# EAGLE board ir-transceiver (EAGLE 4.16)
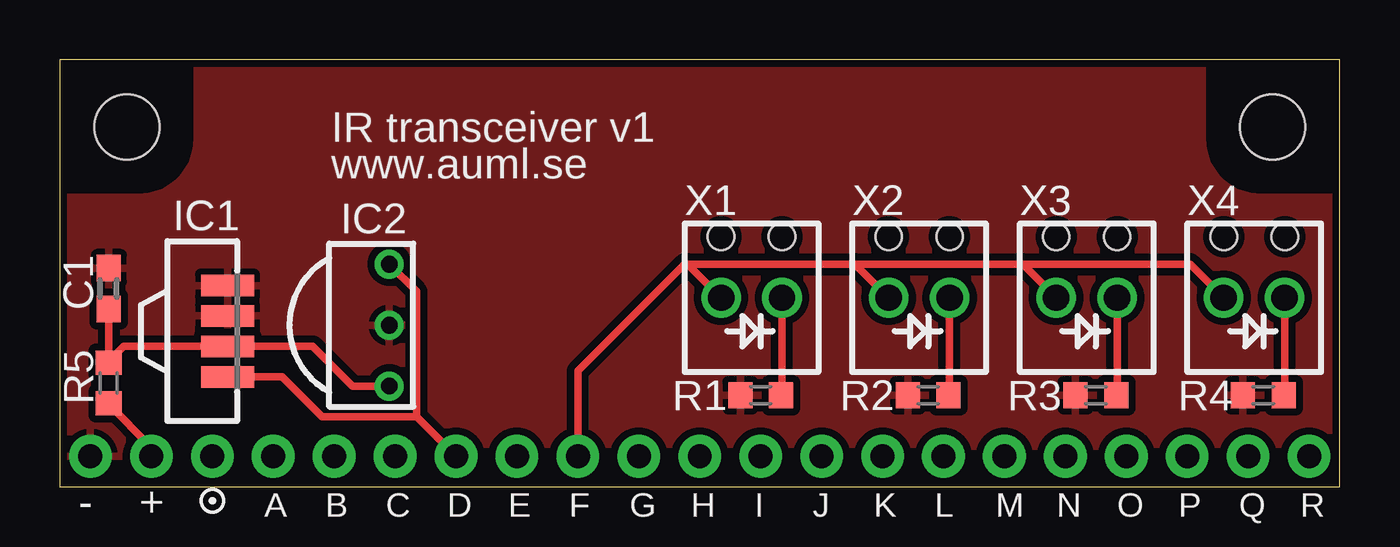
[diagram p0: board, top side]
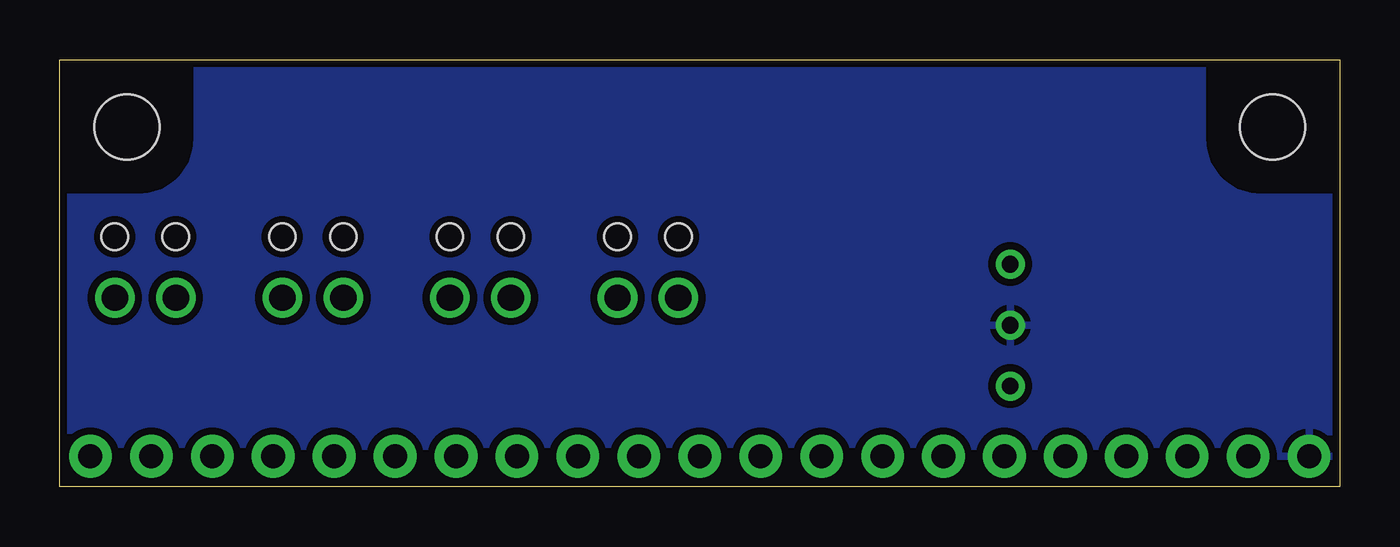
[diagram p1: board, bottom side, seen from below]

Size 53.34 x 17.78 mm. Coordinates in mm from the lower left corner, seen from the top.
Outline: 0,0 53.34,0 53.34,17.78 0,17.78 0,0
Copper layers (1*16): Top 0.035mm / dielectric 1.5mm / Bottom 0.035mm
Design rules "default": minimum track width 10mil, minimum drill 0.6mm, track to track 10mil, track to pad 10mil, pad to pad 10mil, via to via 10mil, smd to smd 8mil, copper to edge 10mil, drill to drill 8mil, minimum pad ring 10mil, minimum via ring 10mil, stop-mask expansion 4mil, vias tented up to drill 0mil, thermal gap 10mil
Holes 2.7 mm at 50.55,14.99 2.79,14.99

## Footprints (pad centres in the part's own frame; a part is rotated, then mirrored left to right if it is on the bottom)
C0603 = smd 1.1 x 1: 1 -0.85,0; 2 0.85,0
SMD = smd 0.9 x 2.2: 1 -1.905,0; 2 -0.635,0; 3 0.635,0; 4 1.905,0
STD = drill 0.7 round: 1 2.54,-0.9; 2 0,-0.9; 3 -2.54,-0.9
R0603@1 = smd 1 x 1.1: 1 -0.85,0; 2 0.85,0
PCB2 = drill 1.1 round: 1 -2.54,0; 2 0,0 | hole 1.1: -2.54,2.54; 0,2.54
CORE_IOHEAD_NOSILC = drill 1 pad 1.778 round: 1 25.4,0; 2 22.86,0; 3 20.32,0; 4 17.78,0; 5 15.24,0; 6 12.7,0; 7 10.16,0; 8 7.62,0; 9 5.08,0; 10 2.54,0; 11 0,0; 12 -2.54,0; 13 -5.08,0; 14 -7.62,0; 15 -10.16,0; 16 -12.7,0; 17 -15.24,0; 18 -17.78,0; 19 -20.32,0; 20 -22.86,0; 21 -25.4,0

## Placement (x,y rotation side)
C1  100n  [C0603]  2.03,8.26 90 top
IC1  TSOP362XX  [SMD]  6.99,6.48 270 top
IC2  [STD]  12.83,6.73 90 top
R1  1k  [R0603@1]  29.21,3.81 180 top
R2  1k  [R0603@1]  36.2,3.81 180 top
R3  1k  [R0603@1]  43.18,3.81 180 top
R4  1k  [R0603@1]  50.16,3.81 180 top
R5  100  [R0603@1]  2.03,4.32 90 top
X1  BLOCK22.54  [PCB2]  30.1,7.87 0 top
X2  BLOCK22.54  [PCB2]  37.08,7.87 0 top
X3  BLOCK22.54  [PCB2]  44.07,7.87 0 top
X4  BLOCK22.54  [PCB2]  51.05,7.87 0 top
X5  CORE_IOHEADEXP  [CORE_IOHEAD_NOSILC]  26.67,1.27 0 bottom

## Library data of the parts
C1 R1-R5 = rcl
IC1 = tsop362xx
IC2 = elirm8601s
X1-X4 = terminal_block
X5 = expboard

## Nets
EXP_A: X5.4
EXP_B: X5.5
EXP_C: X5.6
EXP_E: X5.8
EXP_G: X5.10
EXP_H: X5.11
EXP_I: X5.12
EXP_J: X5.13
EXP_K: X5.14
EXP_L: X5.15
EXP_M: X5.16
EXP_N: X5.17
EXP_O: X5.18
EXP_P: X5.19
EXP_Q: X5.20
EXP_R: X5.21
GND: C1.2 IC1.1 IC1.2 IC2.2 R1.2 R2.2 R3.2 R4.2 X5.1
IRDIOD: X1.1 X2.1 X3.1 X4.1 X5.9
IRMODUL: IC1.4 IC2.1 X5.7
N$1: R4.1 X4.2
N$2: R3.1 X3.2
N$3: R1.1 X1.2
N$4: R2.1 X2.2
V_CAN: X5.3
VCC: R5.1 X5.2
VCC_FILT: C1.1 IC1.3 IC2.3 R5.2

## Tracks (layer width: path | path; a pad name or v marks a point on that pad's centre or on a via)
GND
  pour Bottom (isolate 0.305, rank 3): 5.71,17.78 47.62,17.78 47.62,14.48 arc90 50.04,12.06 53.34,12.06 53.34,1.14 0,1.14 0,12.06 3.3,12.06 arc90 5.71,14.48
  pour Top (isolate 0.305, rank 3): 5.71,17.78 47.62,17.78 47.62,14.48 arc90 50.04,12.06 53.34,12.06 53.34,1.14 0,1.14 0,12.06 3.3,12.06 arc90 5.71,14.48
IRDIOD
  Top 0.305: X4.1 47.12,9.27 40.13,9.27 | 40.13,9.27 X3.1 | 33.15,9.27 40.13,9.27 | 33.15,9.27 X2.1 | 26.16,9.27 26.04,9.27 21.59,4.83 X5.9 | 26.16,9.27 33.15,9.27 | 26.16,9.27 X1.1
IRMODUL
  Top 0.305: IC1.4 9.27,4.57 10.92,2.92 14.86,2.92 | 14.86,2.92 X5.7 | IC2.1 14.86,8.14 14.86,2.92
N$1
  Top 0.305: R4.1 51.05,4.06 X4.2
N$2
  Top 0.305: R3.1 44.07,4.19 X3.2
N$3
  Top 0.305: R1.1 30.1,4.06 X1.2
N$4
  Top 0.305: R2.1 37.08,4.06 X2.2
VCC
  Top 0.305: R5.1 2.03,3.43 3.81,1.65 X5.2
VCC_FILT
  Top 0.305: C1.1 2.03,5.33 2.16,5.21 2.07,5.21 R5.2 2.03,5.21 2.67,5.84 IC1.3 10.54,5.84 12.19,4.19 IC2.3

## Text on the board
tPlace: IR transceiver v1 | www.auml.se | - | + | A | B | C | D | E | F | G | H | I | J | K | L | M | N | O | P | Q | R
Document: Top is component side | Expansion will be mounted bottom to bottom with CoreCard | Change vertical dimension to fit | Remove I/O-header silcscreen if neccesary | Remove mounting holes if neccesary